# EAGLE board stm32_encoderXY_imu (EAGLE 9.5.2)
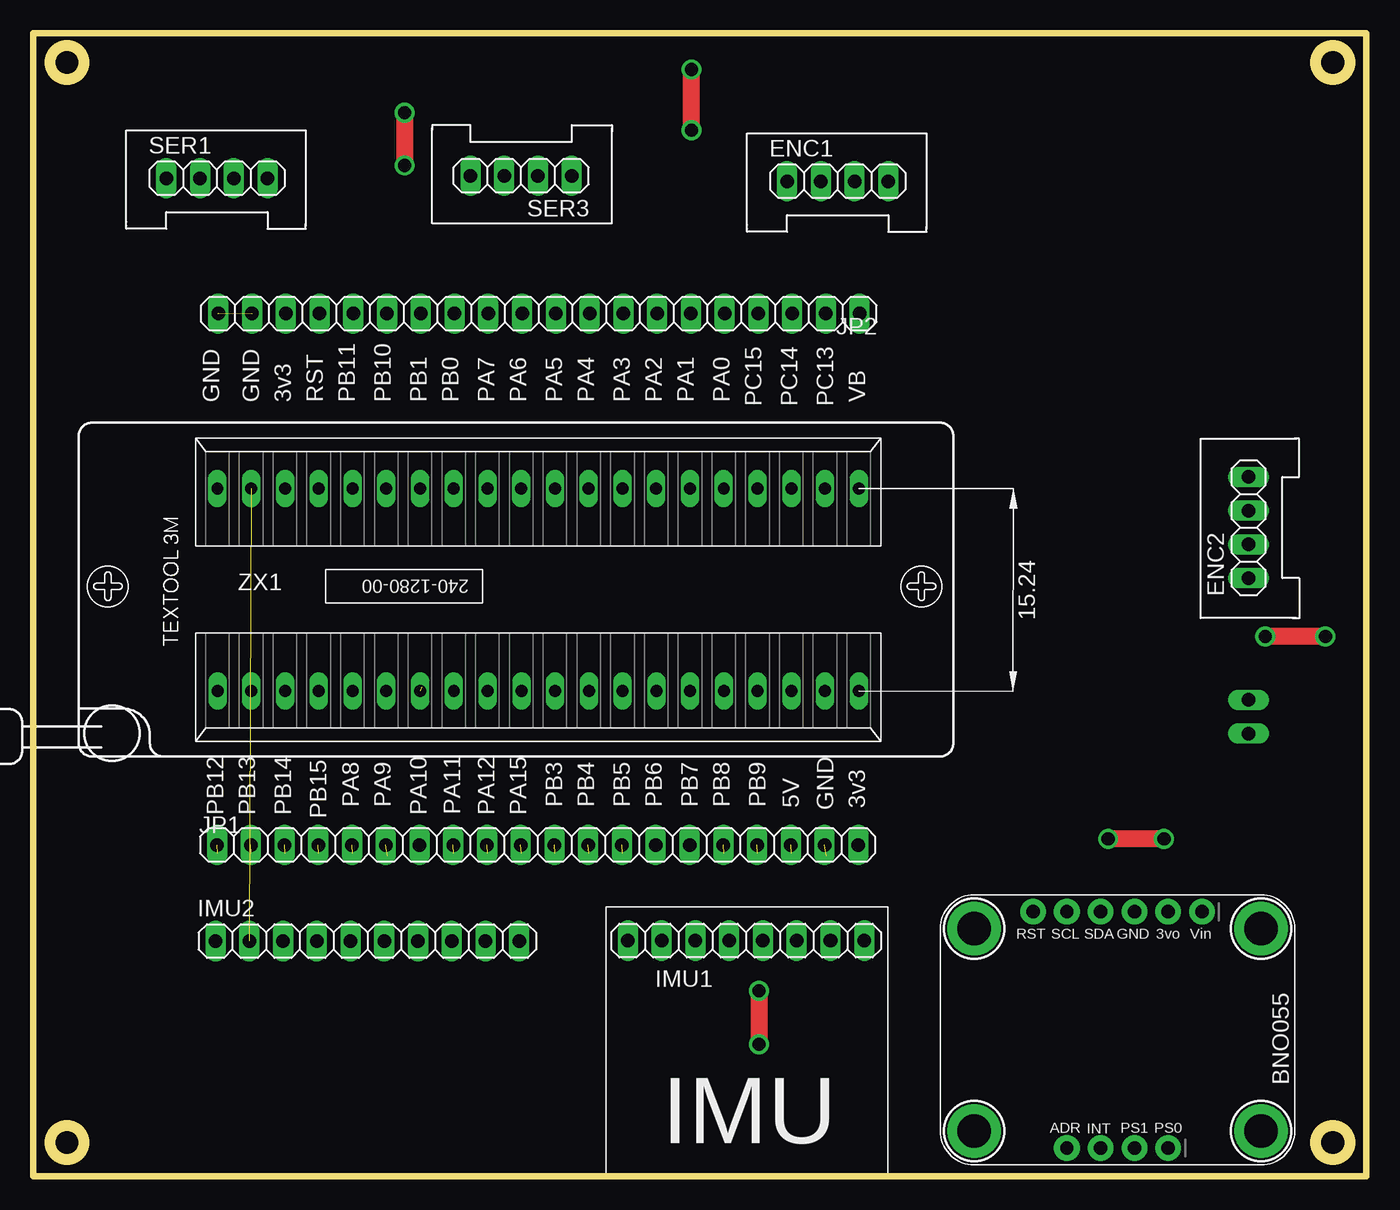
[diagram p0: board, top side]
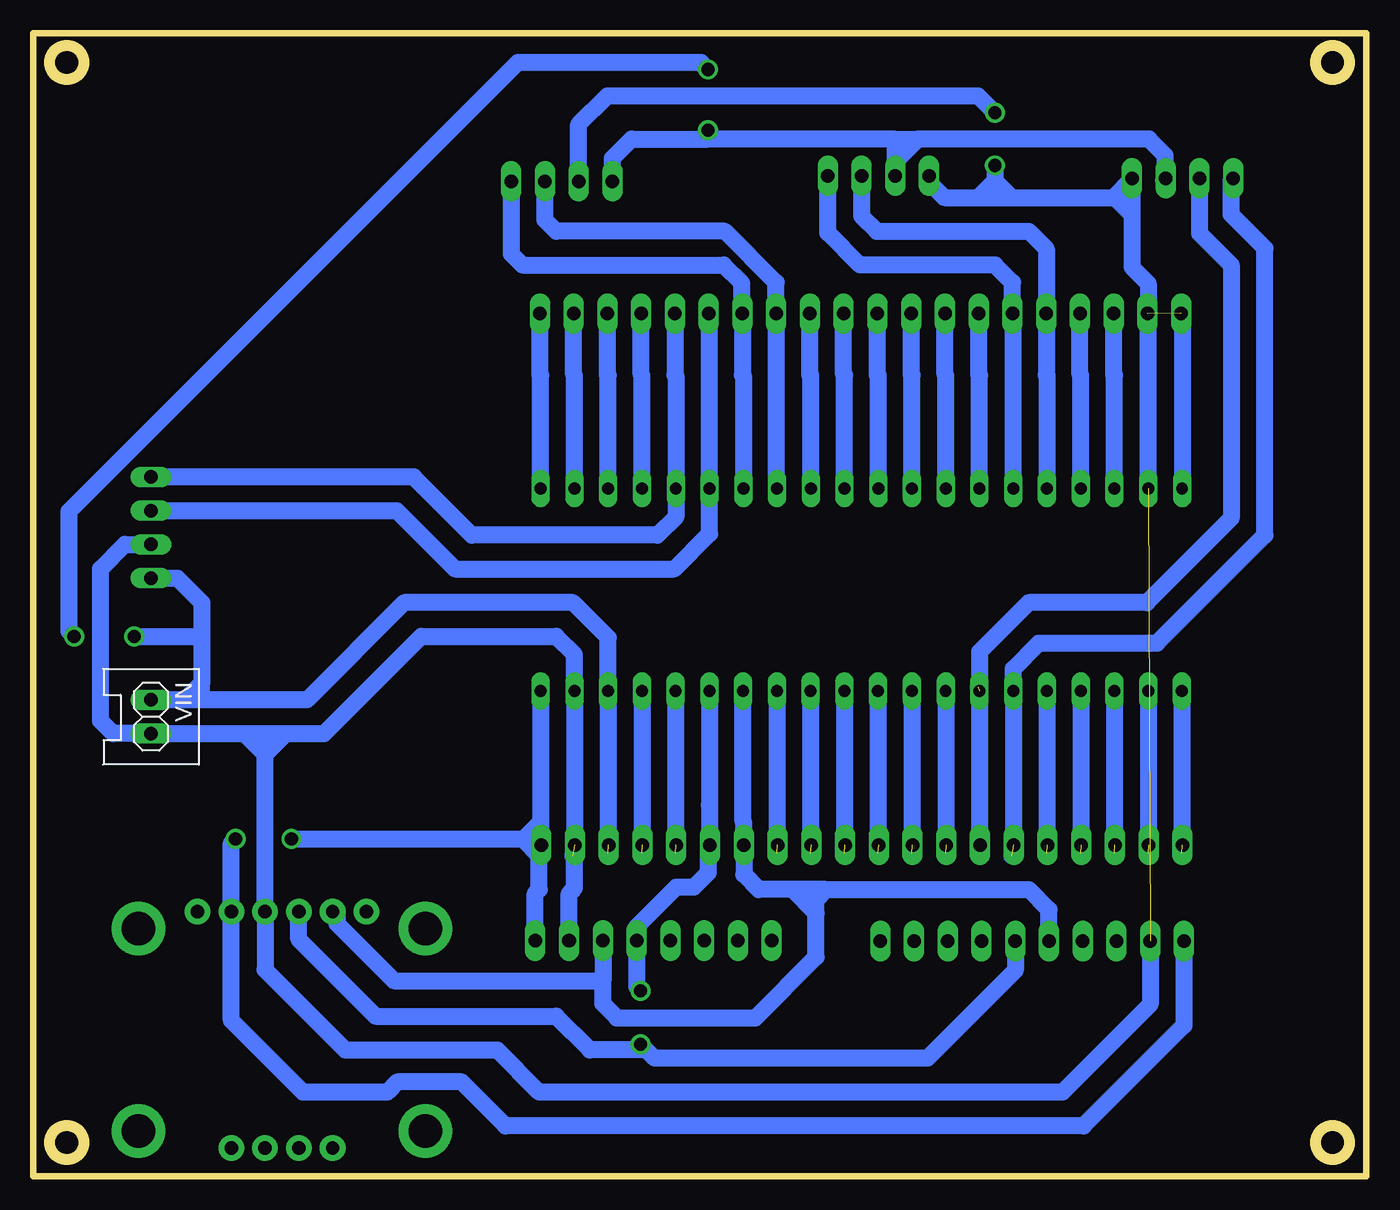
[diagram p1: board, bottom side, seen from below]

Size 100.31 x 86.03 mm. Coordinates in mm from the lower left corner, seen from the top.
Outline: 0,0 100.31,0 100.31,86.03 0,86.03 0,0
Outline: circle at 2.54,83.82 radius 1.27
Outline: circle at 97.79,83.82 radius 1.27
Outline: circle at 97.79,2.54 radius 1.27
Outline: circle at 2.54,2.54 radius 1.27
Copper layers (1*16): Top 0.035mm / dielectric 1.5mm / Bottom 0.035mm
Design rules "design_rules": minimum track width 0.8mm, minimum drill 1mm, track to track 0.6mm, track to pad 0.6mm, pad to pad 0.6mm, via to via 0.6mm, smd to smd 0.6mm, copper to edge 0.8mm, drill to drill 0.8mm, minimum pad ring 10mil, minimum via ring 8mil, stop-mask expansion 4mil, vias tented up to drill 0mil, thermal gap 10mil
Holes 3 mm at 2.54,83.82 97.79,83.82 97.79,2.54 2.54,2.54

## Footprints (pad centres in the part's own frame; a part is rotated, then mirrored left to right if it is on the bottom)
1X04_DATA = drill 1.016 long: 1 -3.81,0; 2 -1.27,0; 3 1.27,0; 4 3.81,0
IMU_GY521 = drill 1.016 long: ADO -6.35,0; GND 6.35,0; INT -8.89,0; SCL 3.81,0; SDA 1.27,0; VCC 8.89,0; XCL -3.81,0; XDA -1.27,0
1X10 = drill 1.016 long: 1 -11.43,0; 2 -8.89,0; 3 -6.35,0; 4 -3.81,0; 5 -1.27,0; 6 1.27,0; 7 3.81,0; 8 6.35,0; 9 8.89,0; 10 11.43,0
1X20 = drill 1.016 long: 1 -24.13,0; 2 -21.59,0; 3 -19.05,0; 4 -16.51,0; 5 -13.97,0; 6 -11.43,0; 7 -8.89,0; 8 -6.35,0; 9 -3.81,0; 10 -1.27,0; 11 1.27,0; 12 3.81,0; 13 6.35,0; 14 8.89,0; 15 11.43,0; 16 13.97,0; 17 16.51,0; 18 19.05,0; 19 21.59,0; 20 24.13,0
1X06_ROUND_76 = drill 1 pad 1.93: 1 -6.35,0; 2 -3.81,0; 3 -1.27,0; 4 1.27,0; 5 3.81,0; 6 6.35,0
1X04_ROUND_76 = drill 1 pad 1.93: 1 -3.81,0; 2 -1.27,0; 3 1.27,0; 4 3.81,0
MOUNTINGHOLE_2.5_PLATED_THICK = drill 2.5 pad 4: P$1 0,0
1X02_DATA = drill 1.016 long: 1 -1.27,0; 2 1.27,0
240-1280-00-0602J = drill 0.9 long: 1 -24.12,-8.88; 2 -21.58,-8.88; 3 -19.04,-8.88; 4 -16.5,-8.88; 5 -13.96,-8.88; 6 -11.42,-8.88; 7 -8.88,-8.88; 8 -6.34,-8.88; 9 -3.8,-8.88; 10 -1.26,-8.88; 11 1.28,-8.88; 12 3.82,-8.88; 13 6.36,-8.88; 14 8.9,-8.88; 15 11.44,-8.88; 16 13.98,-8.88; 17 16.52,-8.88; 18 19.06,-8.88; 19 21.6,-8.88; 20 24.14,-8.88; 21 24.13,6.35; 22 21.59,6.35; 23 19.05,6.35; 24 16.51,6.35; 25 13.97,6.35; 26 11.43,6.35; 27 8.89,6.35; 28 6.35,6.35; 29 3.81,6.35; 30 1.27,6.35; 31 -1.27,6.35; 32 -3.81,6.35; 33 -6.35,6.35; 34 -8.89,6.35; 35 -11.43,6.35; 36 -13.97,6.35; 37 -16.51,6.35; 38 -19.05,6.35; 39 -21.59,6.35; 40 -24.13,6.35

## Placement (x,y rotation side)
ENC1  ENC_Y  [1X04_DATA]  60.53,74.89 0 top
ENC2  ENC_X  [1X04_DATA]  91.45,48.83 90 top
IMU1  IMU_ROBOCON_GY521  [IMU_GY521]  53.64,17.74 0 top
IMU2  [1X10]  25.14,17.71 0 top
JP1  [1X20]  37.95,24.95 0 top
JP2  [1X20]  38.05,64.93 180 top
JP5  [1X06_ROUND_76]  81.6,19.92 180 top
JP6  [1X04_ROUND_76]  81.6,2.14 180 top
SER1  [1X04_DATA]  13.82,75.11 0 top
SER3  [1X04_DATA]  36.72,75.31 180 top
U$4  MOUNTINGHOLE2.5_THICK  [MOUNTINGHOLE_2.5_PLATED_THICK]  92.39,3.41 180 top
U$5  MOUNTINGHOLE2.5_THICK  [MOUNTINGHOLE_2.5_PLATED_THICK]  92.39,18.65 180 top
U$6  MOUNTINGHOLE2.5_THICK  [MOUNTINGHOLE_2.5_PLATED_THICK]  70.8,3.41 180 top
U$7  MOUNTINGHOLE2.5_THICK  [MOUNTINGHOLE_2.5_PLATED_THICK]  70.8,18.65 180 top
VIN  [1X02_DATA]  91.45,34.59 270 bottom
ZX1  ZIF_401280  [240-1280-00-0602J]  37.99,45.41 0 top

## Library data of the parts
ENC1 ENC2 IMU1 JP1 JP2 SER1 SER3 VIN ZX1 = MIA_LIBRARY-2-2-2
IMU2 = MIA-Training
JP5 JP6 = microbuilder
U$4-U$7 = microbuilder; BOM: EXCLUDE

## Nets
3V3@1: IMU1.VCC IMU2.1 JP1.20 JP5.2 ZX1.20
3V3@2: JP2.18 ZX1.38
5V: ENC1.1 ENC2.1 JP1.18 SER1.3 SER3.3 VIN.1 ZX1.18
GND: ENC1.2 ENC2.2 IMU1.GND IMU2.2 JP1.19 JP2.19 JP2.20 JP5.3 SER1.4 SER3.4 VIN.2 ZX1.19 ZX1.39 ZX1.40
I2CADDR_3V: JP6.4
INT_3V: JP6.3
PA_0: ENC2.4 JP2.5 ZX1.25
PA_1: ENC2.3 JP2.6 ZX1.26
PA_2: ENC1.4 JP2.7 ZX1.27
PA_3: ENC1.3 JP2.8 ZX1.28
PA_4: JP2.9 ZX1.29
PA_5: JP2.10 ZX1.30
PA_6: JP2.11 ZX1.31
PA_7: JP2.12 ZX1.32
PA_8: JP1.5 ZX1.5
PA_9: JP1.6 SER1.1 ZX1.6
PA_10: JP1.7 SER1.2 ZX1.7
PA_11: JP1.8 ZX1.8
PA_12: JP1.9 ZX1.9
PA_15: JP1.10 ZX1.10
PB_0: JP2.13 ZX1.33
PB_1: JP2.14 ZX1.34
PB_3: JP1.11 ZX1.11
PB_4: JP1.12 ZX1.12
PB_5: JP1.13 ZX1.13
PB_6: IMU1.SCL IMU2.5 JP1.14 JP5.5 ZX1.14
PB_7: IMU1.SDA IMU2.6 JP1.15 JP5.4 ZX1.15
PB_8: JP1.16 ZX1.16
PB_9: JP1.17 ZX1.17
PB_10: JP2.15 SER3.1 ZX1.35
PB_11: JP2.16 SER3.2 ZX1.36
PB_12: JP1.1 ZX1.1
PB_13: JP1.2 ZX1.2
PB_14: JP1.3 ZX1.3
PB_15: JP1.4 ZX1.4
PC_13: JP2.2 ZX1.22
PC_14: JP2.3 ZX1.23
PC_15: JP2.4 ZX1.24
PS0_3V: JP6.1
PS1_3V: JP6.2
RESET: JP2.17 ZX1.37
VB: JP2.1 ZX1.21

## Tracks (layer width: path | path; a pad name or v marks a point on that pad's centre or on a via)
3V3@1  (via drill 1)
  Top 1.27: v85.09,25.4 v80.88,25.4
  Bottom 1.27: ZX1.20 62.13,26.67 | 62.13,26.67 62.13,25.4 | 62.13,25.4 62.13,24.99 JP1.20 | JP1.20 62.23,24.8 62.23,24.13 | IMU1.VCC 62.53,21.29 62.23,21.59 62.23,24.13 | IMU2.1 13.71,11.37 21.27,3.81 64.77,3.81 68.07,7.11 72.9,7.11 73.66,6.35 80.01,6.35 85.41,11.75 JP5.2 85.41,25.08 v85.09,25.4 | v80.88,25.4 63.5,25.4 | 62.54,25.4 62.13,25.4 | JP1.20 62.54,25.4 | 62.54,25.4 63.4,25.4 | 63.5,25.4 62.23,24.13 | 63.5,25.4 63.4,25.4 | 63.4,25.4 62.13,26.67
3V3@2
  Bottom 1.27: ZX1.38 18.94,60.27 19,60.34 JP2.18
5V  (via drill 1)  (1 unrouted)
  Top 1.27: v49.53,78.74 v49.53,83.3 | v97.23,40.64 v92.71,40.64
  Bottom 1.27: 57.05,24.3 ZX1.18 57.05,40.54 59.69,43.18 72.39,43.18 79.7,35.87 87.63,35.87 | 87.63,35.87 88.9,35.87 | 88.9,35.87 VIN.1 | 33.73,78.06 16.36,78.06 15.13,76.83 15.13,75.15 SER1.3 15.24,74.97 15.24,74.93 | 33.73,78.06 35.45,76.35 SER3.3 35.45,77.95 35.56,78.06 | ENC2.1 89.47,45.02 87.63,43.18 87.63,40.64 | 87.63,37.13 88.9,35.87 | 87.63,40.64 87.63,37.13 | 87.63,35.87 87.63,37.13 | ENC1.1 56.73,76.62 55.29,78.06 49.53,78.06 | 35.56,78.06 49.53,78.06 | 35.56,78.06 33.73,78.06 | 49.53,78.06 v49.53,78.74 | v49.53,83.3 50.05,83.82 63.86,83.82 97.63,50.05 97.63,41.03 v97.23,40.64 | v92.71,40.64 87.63,40.64
  other vias: 35.45,75.31
GND  (via drill 1)  (4 unrouted)
  Top 1.27: v27.94,80.05 v27.94,76.08
  Bottom 1.27: ZX1.40 13.86,64.86 13.97,64.97 | 59.59,24.23 ZX1.19 59.59,39.27 60.96,40.64 71.12,40.64 78.44,33.33 81.29,33.33 | 59.59,24.23 59.69,24.13 | ZX1.39 16.4,64.86 | 16.4,64.86 JP2.19 | IMU1.GND 59.99,21.29 59.59,21.69 59.59,24.23 | VIN.2 92.41,33.33 | VIN.2 84.44,33.33 | 84.44,33.33 83.82,33.33 | 83.82,33.33 82.55,33.33 | 82.55,33.33 81.29,33.33 | 82.55,33.33 82.87,33.01 82.87,32.37 | 82.87,31.75 JP5.3 82.87,15.56 76.83,9.53 65.41,9.53 62.23,6.35 22.86,6.35 16.25,12.96 IMU2.2 | 82.87,31.75 82.87,32.37 | 83.82,33.33 82.87,32.37 | 82.87,31.75 81.29,33.33 | 82.87,31.75 84.44,33.33 | 17.63,73.66 SER1.4 17.63,75.08 19.05,73.66 | 17.63,73.66 17.63,72.39 | 17.63,72.39 17.63,68.43 16.4,67.2 16.4,64.86 | SER3.4 32.91,74.81 31.75,73.66 29.21,73.66 | 29.21,73.66 27.94,73.66 | 27.94,73.66 26.67,73.66 | 26.67,73.66 19.05,73.66 | 18.9,73.66 17.63,73.66 | 17.63,72.39 18.9,73.66 | 18.9,73.66 19.05,73.66 | VIN.2 94.28,33.33 95.25,34.29 95.25,45.72 93.42,47.55 ENC2.2 | ENC1.2 59.27,79.17 57.11,81.32 29.21,81.32 v27.94,80.05 | v27.94,76.08 27.94,74.93 | 27.94,73.66 27.94,74.93 | 27.94,74.93 26.67,73.66 | 27.94,74.93 29.21,73.66
PA_0
  Bottom 1.27: JP2.5 52.02,60.34 51.96,60.27 ZX1.25 51.96,49.64 53.34,48.26 67.31,48.26 71.69,52.63 ENC2.4
PA_1
  Bottom 1.27: JP2.6 49.42,64.86 ZX1.26 49.42,48.37 52.07,45.72 68.58,45.72 72.95,50.09 ENC2.3
PA_2
  Bottom 1.27: ZX1.27 46.88,60.27 46.95,60.34 JP2.7 46.99,64.97 46.99,67.2 48.37,68.58 63.5,68.58 64.34,69.42 ENC1.4
PA_3
  Bottom 1.27: ZX1.28 44.41,51.83 JP2.8 44.41,67.27 48.26,71.12 60.96,71.12 61.8,71.97 ENC1.3
PA_4
  Bottom 1.27: ZX1.29 41.8,60.27 41.87,60.34 JP2.9
PA_5
  Bottom 1.27: ZX1.30 39.26,60.27 39.33,60.34 JP2.10
PA_6
  Bottom 1.27: ZX1.31 36.72,60.27 36.78,60.34 JP2.11
PA_7
  Bottom 1.27: ZX1.32 34.18,60.27 34.24,60.34 JP2.12
PA_8  (1 unrouted)
  Bottom 1.27: ZX1.5 24.03,24.3
PA_9  (1 unrouted)
  Bottom 1.27: 26.67,24.13 26.57,24.23 ZX1.6 26.57,38.2 24.64,40.13 15.75,40.13 7.62,48.26 7.62,69.85 10.16,72.39 10.16,74.93 10.16,74.97 SER1.1
PA_10  (1 unrouted)
  Bottom 1.27: JP1.7 29.07,36.69 29.21,36.83 | ZX1.7 29.11,39.47 25.4,43.18 16.51,43.18 10.16,49.53 10.16,68.58 12.55,70.97 SER1.2
PA_11  (1 unrouted)
  Bottom 1.27: ZX1.8 31.65,24.3
PA_12  (1 unrouted)
  Bottom 1.27: ZX1.9 34.19,24.3
PA_15  (1 unrouted)
  Bottom 1.27: ZX1.10 36.73,24.3
PB_0
  Bottom 1.27: ZX1.33 31.64,60.27 31.7,60.34 JP2.13
PB_1
  Bottom 1.27: ZX1.34 29.1,60.27 29.16,60.34 JP2.14
PB_3  (1 unrouted)
  Bottom 1.27: ZX1.11 39.27,24.3
PB_4  (1 unrouted)
  Bottom 1.27: ZX1.12 41.81,24.3
PB_5  (1 unrouted)
  Bottom 1.27: ZX1.13 44.35,24.3
PB_6
  Bottom 1.27: ZX1.14 46.89,26.67 46.84,26.62 JP1.14 46.84,22.71 45.72,21.59 43.18,21.59 | IMU1.SCL 57.45,14.73 | 41.4,19.81 41.4,16.51 45.98,11.93 56.38,11.93 57.45,13 57.45,14.73 | 41.4,19.81 43.18,21.59 | JP5.5 77.45,19.58 77.45,19.01 73.16,14.73 57.45,14.73 | 40.64,21.59 25.4,21.59 23.88,20.07 IMU2.5 | 40.64,21.59 43.18,21.59 | 41.4,19.81 41.4,20.83 40.64,21.59
PB_7  (via drill 1)
  Top 1.27: v54.61,13.97 v54.61,9.95
  Bottom 1.27: ZX1.15 49.43,27.94 | 49.43,27.94 49.43,24.3 | v54.61,13.97 54.91,14.27 IMU1.SDA 54.91,18.79 51.93,21.77 50.62,21.77 49.53,22.86 49.53,24.8 JP1.15 49.38,27.89 49.43,27.94 | JP5.4 80.33,17.84 74.55,12.06 60.96,12.06 58.42,9.53 54.19,9.53 | 54.19,9.53 53.55,8.89 33.02,8.89 26.41,15.49 IMU2.6 | 54.61,10.06 v54.61,9.95 54.19,9.53
PB_8  (1 unrouted)
  Bottom 1.27: ZX1.16 51.97,24.3
PB_9  (1 unrouted)
  Bottom 1.27: ZX1.17 54.51,24.3
PB_10
  Bottom 1.27: ZX1.35 26.56,64.86 JP2.15 26.62,67.27 27.94,68.58 38.1,68.58 40.52,71 SER3.1
PB_11
  Bottom 1.27: ZX1.36 24.02,60.27 24.09,60.34 JP2.16 24.09,69.81 25.4,71.12 36.83,71.12 37.98,72.28 SER3.2
PB_12  (1 unrouted)
  Bottom 1.27: ZX1.1 13.87,24.3
PB_13  (1 unrouted)
  Bottom 1.27: ZX1.2 16.41,24.3
PB_14  (1 unrouted)
  Bottom 1.27: ZX1.3 18.95,24.3
PB_15  (1 unrouted)
  Bottom 1.27: ZX1.4 21.49,24.3
PC_13
  Bottom 1.27: ZX1.22 59.58,60.27 59.65,60.34 JP2.2
PC_14
  Bottom 1.27: ZX1.23 57.04,60.27 57.1,60.34 JP2.3
PC_15
  Bottom 1.27: ZX1.24 54.5,60.27 54.56,60.34 JP2.4
RESET
  Bottom 1.27: ZX1.37 21.48,60.27 21.55,60.34 JP2.17
VB
  Bottom 1.27: ZX1.21 62.12,60.27 62.19,60.34 JP2.1

## Text on the board
tPlace: GND | GND | 3v3 | RST | PB11 | PB10 | PB1 | PB0 | PA7 | PA6 | PA5 | PA4 | PA3 | PA2 | PA1 | PA0 | PC15 | PC14 | PC13 | VB | PA8 | PA9 | PB3 | PB4 | PB5 | PB6 | PB7 | PB8 | PB9 | 5V | GND | 3v3 | PB12 | PB13 | PB14 | PB15 | PA10 | PA11 | PA12 | PA15 | RST | SCL | SDA | GND | 3vo | Vin | BNO055 | ADR | INT | PS1 | PS0